# EAGLE board fanmonitor (EAGLE 6.4)
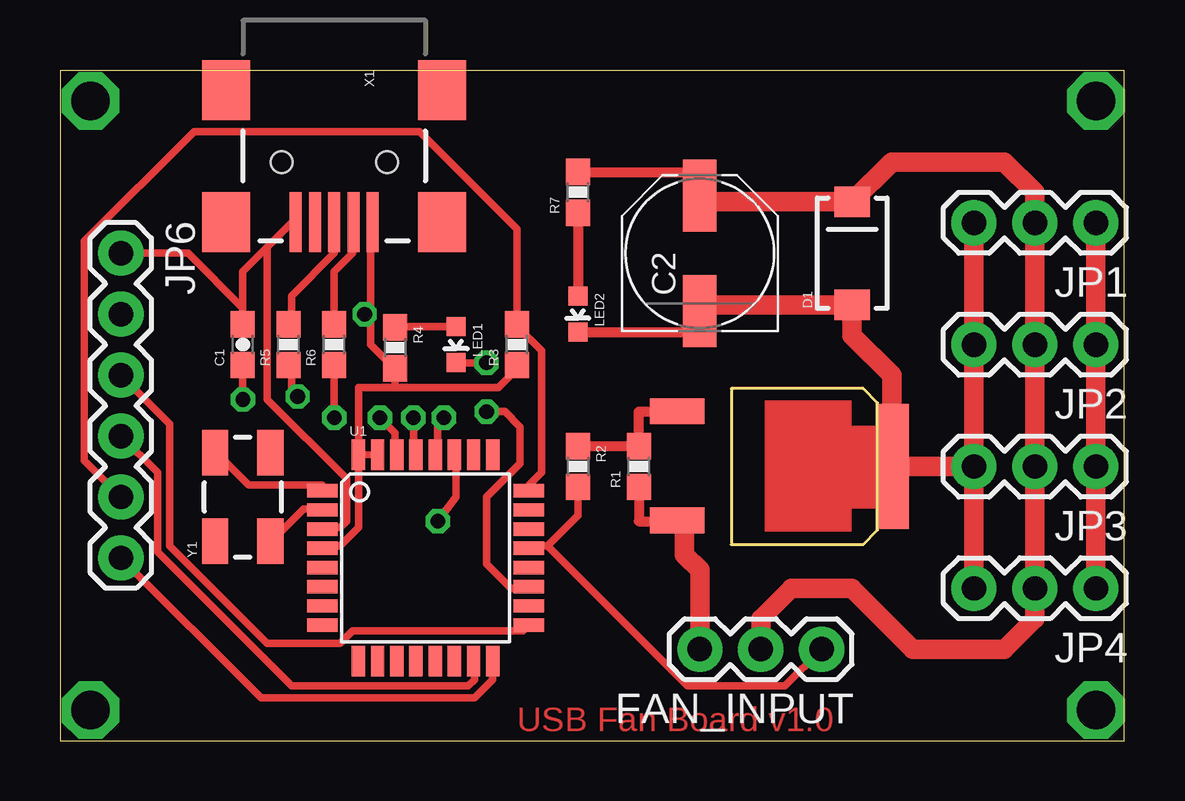
[diagram p0: board, top side]
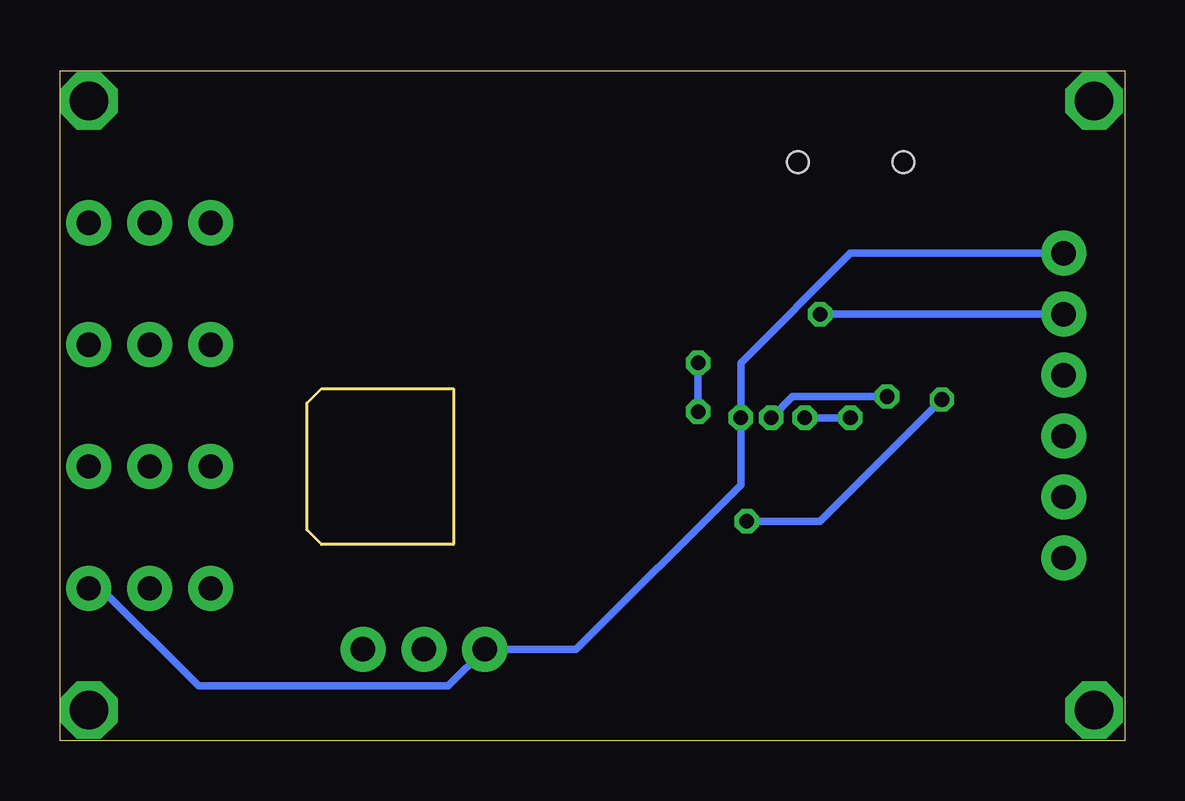
[diagram p1: board, bottom side, seen from below]

Size 44.37 x 27.93 mm. Coordinates in mm from the lower left corner, seen from the top.
Outline: 0,0 44.37,0 44.37,27.93 0,27.93 0,0
Copper layers (1*16): Top 0.035mm / dielectric 1.5mm / Bottom 0.035mm
Design rules "default *": minimum track width 12mil, minimum drill 24mil, track to track 8mil, track to pad 8mil, pad to pad 8mil, via to via 8mil, smd to smd 8mil, copper to edge 20mil, drill to drill 8mil, minimum pad ring 10mil, minimum via ring 8mil, stop-mask expansion 4mil, vias tented up to drill 0mil, thermal gap 10mil

## Footprints (pad centres in the part's own frame; a part is rotated, then mirrored left to right if it is on the bottom)
0603-CAP = smd 1.1 x 1: 1 -0.85,0; 2 0.85,0
PANASONIC_D = smd 3 x 1.4: + 2.4,0; - -2.4,0
SMA-DIODE = smd 1.27 x 1.47: A -2.15,0; C 2.15,0
1X03 = drill 1.016 pad 1.88: 1 0,0; 2 2.54,0; 3 5.08,0
1X06 = drill 1.016 pad 1.88: 1 0,0; 2 2.54,0; 3 5.08,0; 4 7.62,0; 5 10.16,0; 6 12.7,0
LED-0603 = smd 0.8 x 0.8: A 0,-0.75; C 0,0.75
0603-RES = smd 1.1 x 1: 1 -0.85,0; 2 0.85,0
TQFP32-08 = smd 1.27 x 0.559: 1 -4.293,2.8; 2 -4.293,2; 3 -4.293,1.2; 4 -4.293,0.4; 5 -4.293,-0.4; 6 -4.293,-1.2; 7 -4.293,-2; 8 -4.293,-2.8; 17 4.293,-2.8; 18 4.293,-2; 19 4.293,-1.2; 20 4.293,-0.4; 21 4.293,0.4; 22 4.293,1.2; 23 4.293,2; 24 4.293,2.8 | smd 0.559 x 1.27: 9 -2.8,-4.293; 10 -2,-4.293; 11 -1.2,-4.293; 12 -0.4,-4.293; 13 0.4,-4.293; 14 1.2,-4.293; 15 2,-4.293; 16 2.8,-4.293; 25 2.8,4.293; 26 2,4.293; 27 1.2,4.293; 28 0.4,4.293; 29 -0.4,4.293; 30 -1.2,4.293; 31 -2,4.293; 32 -2.8,4.293
TO-252AA = smd 1.067 x 2.28: 1 -2.3,-4.75; 3 2.25,-4.75 | smd 5.2 x 1.3: 4 0,4.25
USB-MINIB = smd 2.5 x 0.5: D+ 2.5,0; D- 2.5,0.8; GND 2.5,-1.6; ID 2.5,-0.8; VBUS 2.5,1.6 | smd 2.5 x 2: MTN1 -3,4.5; MTN2 2.5,4.5; MTN3 -3,-4.5; MTN4 2.5,-4.5 | hole 0.9: 0,2.2; 0,-2.2
CRYSTAL-SMD-5X3 = smd 1.9 x 1.1: 1 -1.85,-1.15; 2 1.85,-1.15; 3 1.85,1.15; 4 -1.85,1.15

## Placement (x,y rotation side)
C1  1uF  [0603-CAP]  7.62,16.51 90 top
C2  470uF  [PANASONIC_D]  26.67,20.32 90 top
D1  [SMA-DIODE]  33.02,20.32 90 top
FAN_INPUT  [1X03]  31.75,3.81 180 top
JP1  [1X03]  43.18,21.59 180 top
JP2  [1X03]  43.18,16.51 180 top
JP3  [1X03]  43.18,11.43 180 top
JP4  [1X03]  43.18,6.35 180 top
JP6  AVR_MINI_PROG  [1X06]  2.54,20.32 270 top
LED1  [LED-0603]  16.51,16.51 180 top
LED2  [LED-0603]  21.59,17.78 180 top
R1  100k  [0603-RES]  24.13,11.43 90 top
R2  1k  [0603-RES]  21.59,11.43 270 top
R3  10K  [0603-RES]  19.05,16.51 90 top
R4  220  [0603-RES]  13.97,16.38 270 top
R5  68  [0603-RES]  9.53,16.51 90 top
R6  68  [0603-RES]  11.43,16.51 90 top
R7  680  [0603-RES]  21.59,22.86 90 top
U1  ATMEGA8U2AU  [TQFP32-08]  15.24,7.62 0 top
U$4  RFD14N05L  [TO-252AA]  30.48,11.43 270 top
X1  USBSMD  [USB-MINIB]  11.43,24.13 270 top
Y1  [CRYSTAL-SMD-5X3]  7.62,10.16 90 top

## Library data of the parts
C1 C2 R1-R7 = SparkFun-Passives
D1 = SparkFun-DiscreteSemi
FAN_INPUT JP1-JP4 JP6 X1 = SparkFun-Connectors
LED1 LED2 = SparkFun-LED
U1 = SparkFun-DigitalIC
U$4 = Synapseware
Y1 = SparkFun-FreqCtrl

## Nets
5V: JP6.2 R3.1 R4.2 U1.4 U1.31 U1.32 X1.VBUS
/RST: JP6.5 R3.2 U1.24
D+: R5.1 U1.29
D-: R6.1 U1.30
GND: C1.2 FAN_INPUT.3 JP1.1 JP2.1 JP3.1 JP4.1 JP6.1 R1.1 U1.3 U1.28 U$4.3 X1.GND
MISO: JP6.3 U1.17
MOSI: JP6.6 U1.16
N$1: LED1.A R4.1
N$2: LED2.A R7.1
N$8: C1.1 U1.27
N$11: U1.1 Y1.3
N$12: U1.2 Y1.1
N$55: R5.2 X1.D+
N$56: R6.2 X1.D-
PWM: FAN_INPUT.1 R2.2 U1.21
PWM_OUT: C2.- D1.A JP1.3 JP2.3 JP3.3 JP4.3 LED2.C U$4.4
SCK: JP6.4 U1.15
SPD: R1.2 R2.1 U$4.1
STAT: LED1.C U1.19
VCC: C2.+ D1.C FAN_INPUT.2 JP1.2 JP2.2 JP3.2 JP4.2 R7.2

## Tracks (layer width: path | path; a pad name or v marks a point on that pad's centre or on a via)
5V  (via drill 0.61)
  Top 0.305: U1.4 11.18,8.13 11.68,8.13 12.45,8.89 12.45,11.68 U1.32 12.45,11.94 | 13.97,14.73 12.45,14.73 12.45,11.94 | 13.97,14.73 13.97,15.49 | 13.97,14.73 18.29,14.73 19.05,15.49 R3.1 | 12.95,17.78 12.95,16.51 13.97,15.49 | 12.95,17.78 12.95,21.59 X1.VBUS | 13.97,15.49 R4.2 | 12.45,11.94 U1.31 | 12.95,17.78 v12.7,17.78
  Bottom 0.305: v12.7,17.78 JP6.2
/RST
  Top 0.305: U1.24 19.56,10.67 20.07,11.18 20.07,16.26 19.05,17.27 R3.2 19.05,21.34 14.99,25.4 5.59,25.4 1.02,20.83 1.02,11.68 JP6.5
D+  (via drill 0.61)
  Top 0.305: v9.91,14.35 9.65,14.61 9.65,15.49 R5.1 | v14.73,13.46 14.73,11.94 U1.29
  Bottom 0.305: v9.91,14.35 13.84,14.35 v14.73,13.46
D-  (via drill 0.61)
  Top 0.305: v11.43,13.46 R6.1 | v13.34,13.46 13.97,12.83 13.97,11.68 U1.30
  Bottom 0.305: v13.34,13.46 v11.43,13.46
GND  (via drill 0.61)
  Top 0.305: v16,13.46 15.75,13.21 15.75,11.68 U1.28 | 7.62,18.03 7.62,19.56 8.64,20.57 | 7.62,18.03 C1.2 | 8.64,20.57 9.65,21.59 X1.GND | 8.64,20.57 8.64,14.22 11.94,10.92 11.94,9.14 11.68,8.89 11.18,8.89 U1.3 | JP6.1 5.33,20.32 7.62,18.03
  Top 0.406: R1.1 24.13,9.14 25.69,9.14 U$4.3
  Top 0.813: JP1.1 JP2.1 JP3.1 JP4.1 | FAN_INPUT.3 26.67,7.11 26.04,7.75 26.04,8.88 U$4.3
  Bottom 0.305: JP6.1 11.43,20.32 16,15.75 v16,13.46 16,10.67 22.86,3.81 FAN_INPUT.3 28.19,2.29 38.61,2.29 42.67,6.35 JP4.1
MISO
  Top 0.305: JP6.3 4.57,13.21 4.57,8.13 8.64,4.06 11.68,4.06 12.19,4.57 19.3,4.57 U1.17
MOSI
  Top 0.305: JP6.6 8.38,1.78 17.27,1.78 18.03,2.54 18.03,3.3 U1.16
N$1
  Top 0.305: LED1.A 16.51,17.27 13.97,17.27 R4.1
N$2
  Top 0.406: R7.1 LED2.A
N$3  (via drill 1.6)
  other vias: 1.27,26.67
N$4  (via drill 1.6)
  other vias: 1.27,1.27
N$5  (via drill 1.6)
  other vias: 43.18,26.67
N$6  (via drill 1.6)
  other vias: 43.18,1.27
N$8  (via drill 0.61)
  Top 0.305: v7.62,14.22 C1.1 | v15.75,9.14 16.51,10.16 16.51,11.68 U1.27
  Bottom 0.305: v7.62,14.22 12.7,9.14 v15.75,9.14
N$11
  Top 0.305: U1.1 10.92,10.67 7.87,10.67 6.6,11.94 Y1.3
N$12
  Top 0.305: U1.2 10.92,9.65 10.16,9.65 8.89,8.38 Y1.1
N$55
  Top 0.305: X1.D+ 11.43,20.32 9.65,18.54 9.65,17.53 R5.2
N$56
  Top 0.305: R6.2 11.43,19.56 12.19,20.32 12.19,21.59 X1.D-
PWM
  Top 0.305: R2.2 21.59,9.4 20.32,8.13 | 20.32,8.13 19.56,8.13 U1.21 | 20.32,8.13 26.16,2.29 30.23,2.29 FAN_INPUT.1
PWM_OUT
  Top 0.406: LED2.C 26.66,17.03 26.67,17.02 C2.-
  Top 0.813: C2.- 26.92,18.17 D1.A 33.02,16.89 34.67,15.24 34.67,11.49 U$4.4 JP3.3 | JP3.3 JP2.3 JP1.3 | JP3.3 JP4.3
SCK
  Top 0.305: JP6.4 4.06,11.18 4.06,7.87 9.65,2.29 17.02,2.29 17.27,2.54 17.27,3.3 U1.15
SPD
  Top 0.406: U$4.1 25.72,13.72 24.13,13.72 R1.2 R2.1
STAT  (via drill 0.61)
  Top 0.305: v17.78,15.75 16.51,15.75 LED1.C | U1.19 19.3,6.35 18.8,6.35 17.78,7.37 17.78,10.16 19.18,11.56 19.18,13.08 18.54,13.72 v17.78,13.72
  Bottom 0.305: v17.78,13.72 v17.78,15.75
VCC
  Top 0.406: R7.2 26.71,23.71 26.8,23.62 26.8,22.85 C2.+ | 32.9,22.47 D1.C 33.27,22.47 33.27,22.48
  Top 0.813: 32.9,22.47 26.92,22.47 C2.+ | FAN_INPUT.2 29.21,5.08 30.48,6.35 33.02,6.35 35.56,3.81 39.37,3.81 40.64,5.08 JP4.2 JP3.2 JP2.2 JP1.2 40.64,22.86 39.37,24.13 34.68,24.13 D1.C

## Text on the board
Top: USB Fan Board v1.0